# Altium PCB DataLogger_XIAO.PcbDoc
Units mm, origin at the board's own origin, x right, y up, seen from the top; angles counter-clockwise.
Board outline 60 x 60 mm, 2 copper layers (Top Layer, Bottom Layer); 12 components, 12 nets, 42 pads, 2 vias.
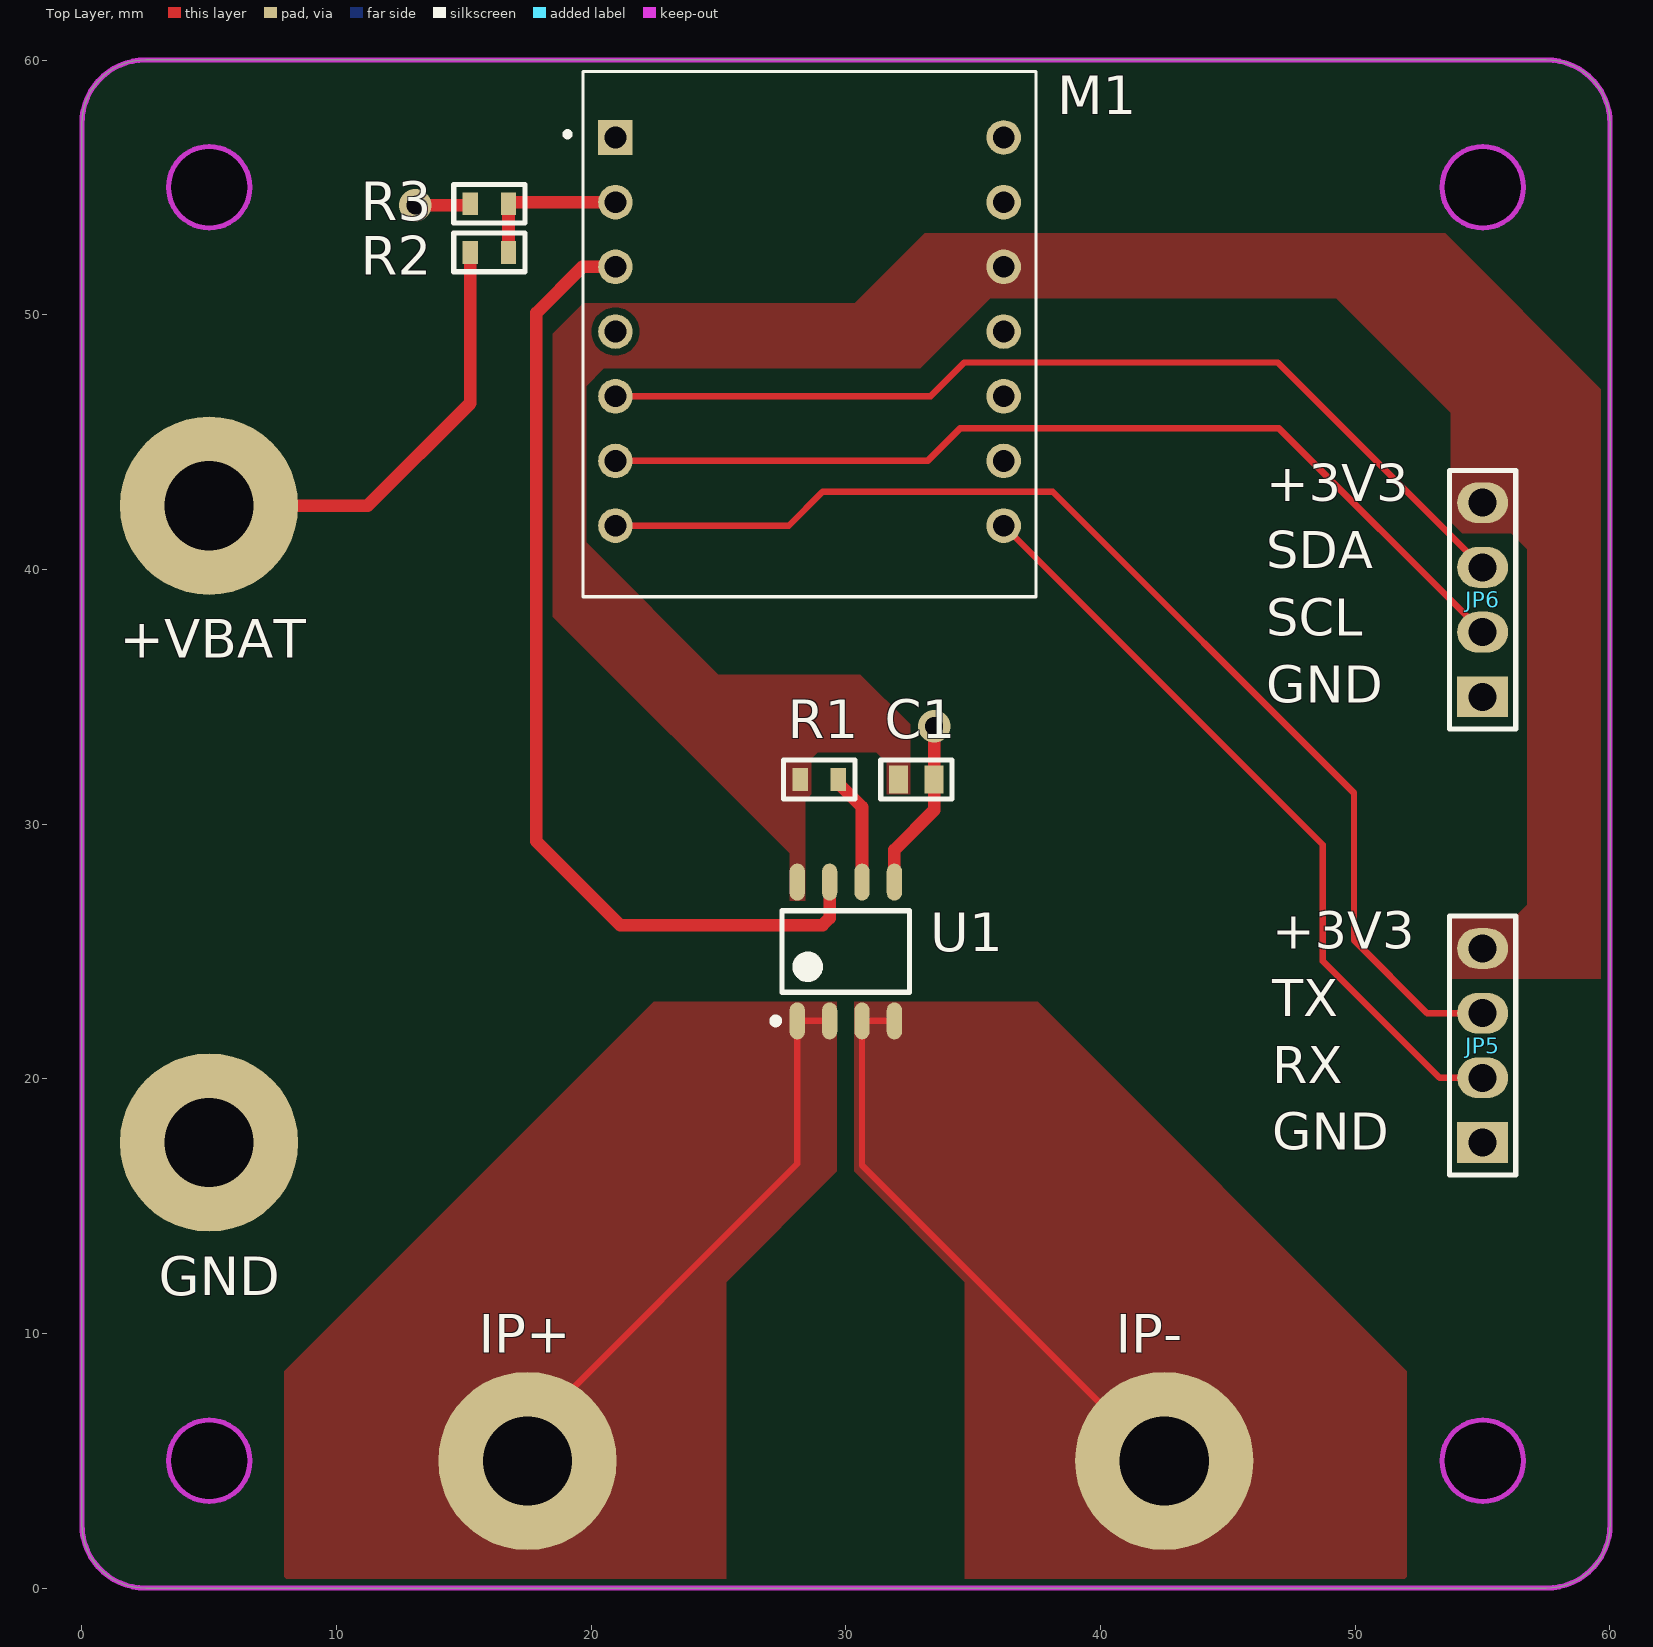
[diagram p0: Top Layer view]
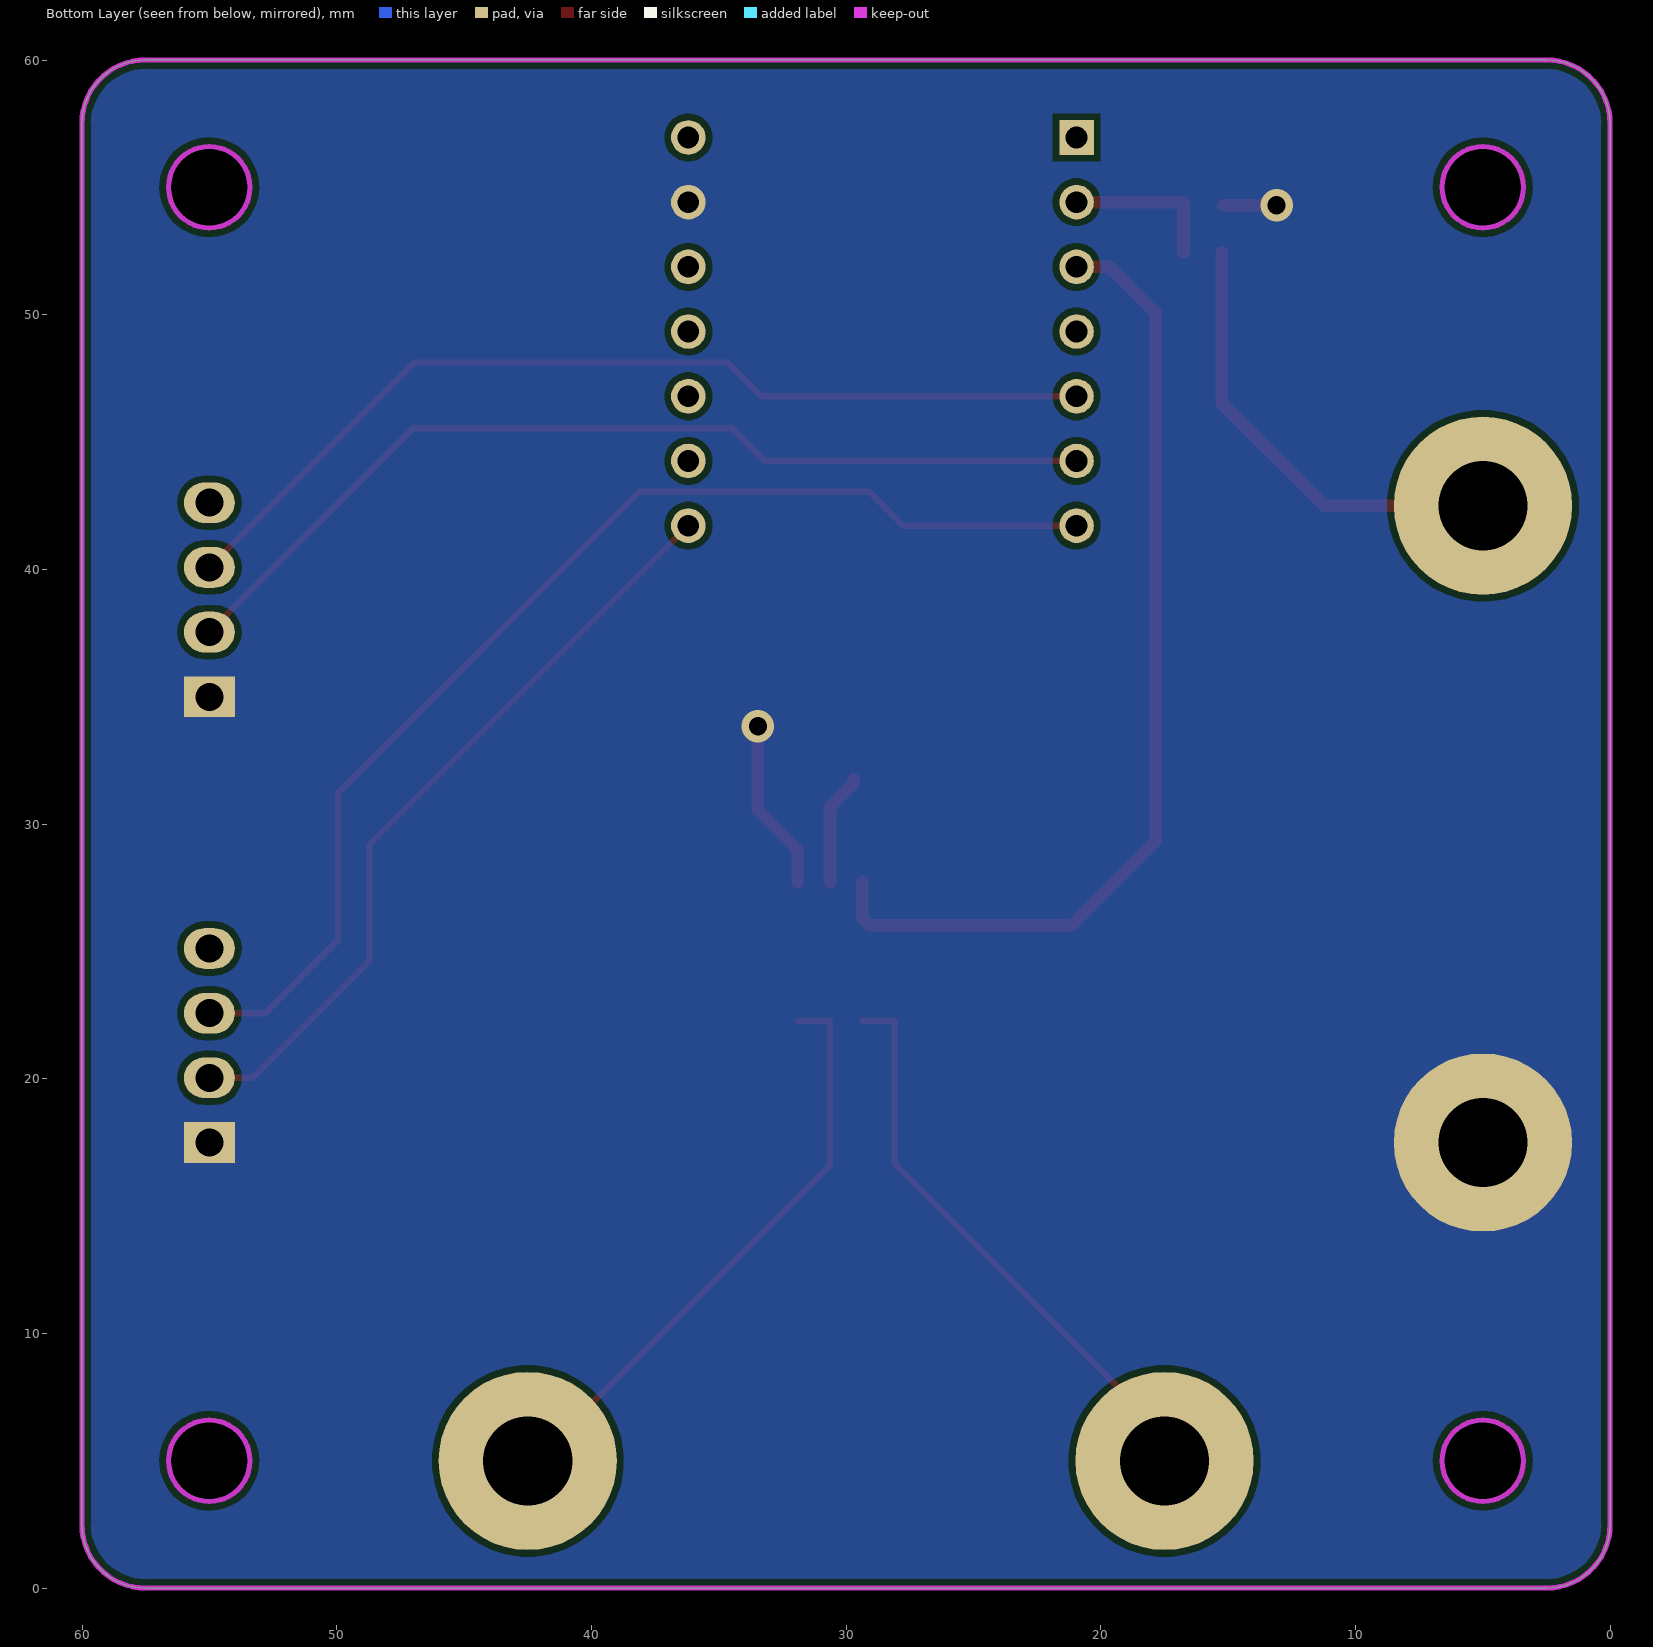
[diagram p1: Bottom Layer view, seen from below]
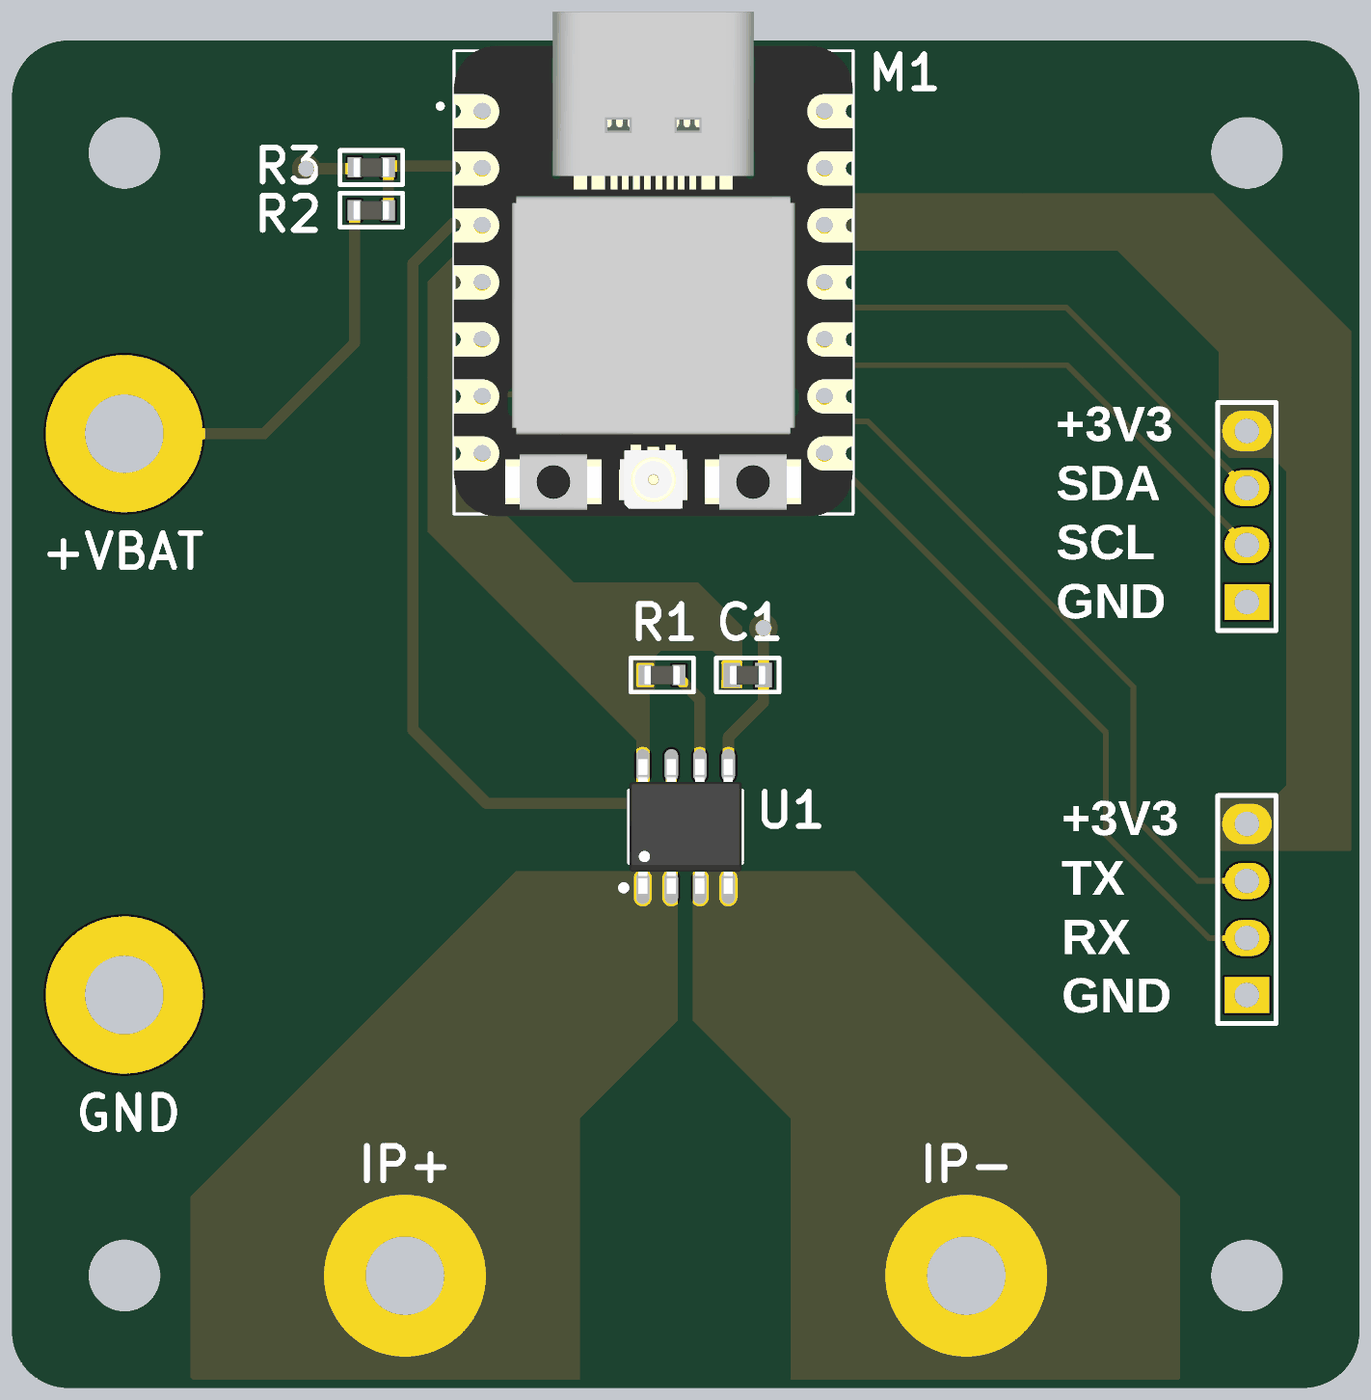
[diagram p2: 3D render of the assembled board from above, using the file's embedded part models]

## Layer stack, top to bottom
Top Solder: solder mask 0.0102, Solder Resist, Dk 3.5
Top Layer: signal copper 0.0356
Dielectric 1: dielectric 0.32, FR-4, Dk 4.8
Bottom Layer: signal copper 0.0356
Bottom Solder: solder mask 0.0102, Solder Resist, Dk 3.5

## Board outline
2.506,0.006 cw(c2.506,2.506) 0.006,2.506 0.006,57.506 cw(c2.506,57.506) 2.506,60.006 57.506,60.006 cw(c57.506,57.506) 60.006,57.506 60.006,2.506 cw(c57.506,2.506) 57.506,0.006
cut-out: 53.406,5.006 ccw(c55.006,5.006) 55.006,3.406 ccw(c55.006,5.006) 56.606,5.006 ccw(c55.006,5.006) 55.006,6.606 ccw(c55.006,5.006)
cut-out: 55.006,53.406 cw(c55.006,55.006) 53.406,55.006 cw(c55.006,55.006) 55.006,56.606 cw(c55.006,55.006) 56.606,55.006 cw(c55.006,55.006)
cut-out: 5.006,53.406 cw(c5.006,55.006) 3.406,55.006 cw(c5.006,55.006) 5.006,56.606 cw(c5.006,55.006) 6.606,55.006 cw(c5.006,55.006)
cut-out: 5.006,3.406 cw(c5.006,5.006) 3.406,5.006 cw(c5.006,5.006) 5.006,6.606 cw(c5.006,5.006) 6.606,5.006 cw(c5.006,5.006)

## Design rules (kind name [scope] priority, off if disabled: settings)
Clearance [All] p1: gap=0.254 ignorepadtopadclearanceinfootprint=FALSE except(0: Arc-Hole Track-Hole SMDPad-Hole THPad-Hole Via-Hole Fill-Hole Poly-Hole Region-Hole Text-Hole)
PlaneConnect [All] p1: planeconnectstyle=Direct reliefexpansion=0.508 reliefentries=4 reliefconductorwidth=0.254 reliefairgap=0.254
PolygonConnect [All] p1: connectstyle=Direct reliefconductorwidth=0.254 reliefentries=4 polygonreliefangle="90 Angle" airgapwidth=0.254
RoutingVias [All] p1: holewidth=0.711 width=1.27 viastyle="Through Hole" minholewidth=0.711 minwidth=1.27 maxholewidth=0.711 maxwidth=1.27
SolderMaskExpansion [All] p1: expansion=0.102 istentingtop=FALSE
Width [All] p1: maxlimit=1 minlimit=0.254 preferedwidth=0.254 minimp=50.000000 maximp=50.000000 favimp=50.000000
29 further rules are at their usual default settings.

## Components (designator, comment, footprint, x,y, rotation, side; value= is the part's Value field where it differs from the comment)
+VBAT "HDR 1X3MM5" "TERMINAL 1X3.55"#1 55,30 r0 top (schematic designator JP3)
C1 "100nF" c0603 32.766,31.75 r0 top
GND "HDR 1X3MM5" "TERMINAL 1X3.55"#2 56.388,17.653 r0 top (schematic designator JP4)
IP+ "HDR 1X3MM5" "TERMINAL 1X3.55"#3 23.622,5.461 r0 top (schematic designator JP1)
IP- "HDR 1X3MM5" "TERMINAL 1X3.55"#4 40.64,5.588 r0 top (schematic designator JP2)
JP5 "HDR 1x4" Hdr_1x4_2.54MM 55,17.5 r180 top
JP6 "HDR 1x4" Hdr_1x4_2.54MM 55,35 r180 top
M1 "XIAO_ESP32C3" MODULE_XIAO_ESP32C3 28.575,49.403 r0 top
R1 "10k" R0603 28.956,31.75 r180 top
R2 "10k" R0603 16.002,52.451 r180 top
R3 "10k" R0603 16.002,54.356 r0 top
U1 "ACS711" SOIC-8N-ACS711 30,25 r90 top

## Footprints (in the part's own frame and the unit in brackets; to place one, negate y for a bottom-side part, rotate by r counter-clockwise, add the part's x,y. Pads: shape width x height; smd on the part's side, far side on the other; paste and mask are expansions set on the pad)
c0603 [mm] "C0603"
  rect 0.75x1.1 smd: 1(-0.7,0) 2(0.7,0)
  silkscreen extent -1.4,-0.76 1.4,0.76, body extent -0.8,-0.42 0.8,0.42, height 0.8
Hdr_1x4_2.54MM [mm] "Creator MM"
  rect 2x1.6 hole 1.1: 1(0,0)
  oval 2x1.6 hole 1.1: 2(0,-2.54) 3(0,-5.08) 4(0,-7.62)
  silkscreen extent -1.3,-8.89 1.3,1.27
MODULE_XIAO_ESP32C3 [mm]
  rect 1.358x1.358 / inner round 1.358 / far side rect 1.358x1.358 hole 0.85 mask+0.05: 1(-7.62,7.556)
  round 1.358 hole 0.85 mask+0.05: 2(-7.62,5.016) 3(-7.62,2.476) 4(-7.62,-0.064) 5(-7.62,-2.603) 6(-7.62,-5.143) 7(-7.62,-7.683) 8(7.62,-7.683) 9(7.62,-5.143) 10(7.62,-2.603) 11(7.62,-0.064) 12(7.62,2.476) 13(7.62,5.016) 14(7.62,7.556)
  silkscreen extent -9.6,-10.48 8.89,10.15, body extent -8.91,-10.58 8.87,11.88, height 4.21
R0603 [mm]
  rect 0.6x0.9 smd: 1(-0.75,0) 2(0.75,0)
  silkscreen extent -1.4,-0.76 1.4,0.76, body extent -0.8,-0.42 0.8,0.42, height 0.8
SOIC-8N-ACS711 [mm] "SOIC, 8-Leads, Body 4.90x3.90mm, Pitch 1.27mm, IPC Medium Density"
  oval 1.45x0.6 smd: 1(-2.725,1.905) 2(-2.725,0.635) 3(-2.725,-0.635) 4(-2.725,-1.905) 5(2.725,-1.905) 6(2.725,-0.635) 7(2.725,0.635) 8(2.725,1.905)
  silkscreen extent -2.85,-2.5 1.6,2.88, body extent -3,-2.5 3,2.5, height 1.75
"TERMINAL 1X3.55"#1 [mm] "TERMINAL 1X3.55"
  round 7 hole 3.5: 1(-50,12.5)
"TERMINAL 1X3.55"#2 [mm] "TERMINAL 1X3.55"
  round 7 hole 3.5: 1(-51.388,-0.153)
"TERMINAL 1X3.55"#3 [mm] "TERMINAL 1X3.55"
  round 7 hole 3.5: 1(-6.122,-0.461)
"TERMINAL 1X3.55"#4 [mm] "TERMINAL 1X3.55"
  round 7 hole 3.5: 1(1.86,-0.588)

## Part data
+VBAT GND IP+ IP-: library part PIN3MM5, "BERGSTIK 3.5 MM", Color=Black, Manufacturer=FCI, Manufacturer Part Number=68000-103HLF, Supplier Part Number 1=609-3461-ND, .Checked PCB=used, .Checked SCH=used, .Creator=MM, Category="Connectors, Interconnects", ComponentLink1Description=http://portal.fciconnect.com/Comergent//fci/drawing/68000.pdf, ComponentLink1URL=http://portal.fciconnect.com/Comergent//fci/drawing/68000.pdf, Connector Type="Header, Unshrouded", Contact Finish="Gold or Gold, GXT™", Contact Finish Thickness="30µin (0.76µm)", Contact Mating Length="0.230\" (5.84mm)", Contact Type="Male Pin", Fastening Type=-, Features=-, Mounting Type="Through Hole", Number of Positions=3, Number of Positions Loaded=All, Number of Rows=1, Packaging=Bulk, Pitch="0.100\" (2.54mm)", Pricing 1="1=0.15, 10=0.145, 25=0.108, 50=0.0924 (USD)", RoHS="RoHS Compliant", Row Spacing=-, Stock 1=37214, Supplier 1=Digi-Key, Termination=Solder
C1: library part 06035C104K4Z4A, "Multilayer Ceramic Capacitor, 0.1 uF, 50 V, ï¿½ 10%, X7R, 0603 [1608 Metric]", Case Code (Imperial)=0603, Case Code (Metric)=1608, Dielectric=X7R, Manufacturer="Kyocera AVX", Max Operating Temperature=125°C, Min Operating Temperature=-55°C, Package Quantity=15000, Ratings=AEC-Q200, Supplier Part Number=96Y8355, Tolerance=10%, Voltage Rating=50V, Case/Package=0603, Category="Ceramic Capacitors", ComponentLink1Description=http://www.mouser.com/ds/2/40/AutoMLCC-777028.pdf?src-supplier=Mouser, ComponentLink1URL=http://www.mouser.com/ds/2/40/AutoMLCC-777028.pdf?src-supplier=Mouser, ComponentLink2Description=https://www.avx.com/docs/Catalogs/flexiterm.pdf?src-supplier=Avnet, ComponentLink2URL=https://www.avx.com/docs/Catalogs/flexiterm.pdf?src-supplier=Avnet, ComponentLink3Description=http://catalogs.avx.com/SurfaceMount.pdf?src-supplier=Digikey, ComponentLink3URL=http://catalogs.avx.com/SurfaceMount.pdf?src-supplier=Digikey, ComponentLink4Description=http://www.farnell.com/datasheets/2880953.pdf?src-supplier=Newark, ComponentLink4URL=http://www.farnell.com/datasheets/2880953.pdf?src-supplier=Newark, ComponentLink5Description=http://www.avx.com/docs/Catalogs/flexiterm.pdf?src-supplier=Future+Electronics, ComponentLink5URL=http://www.avx.com/docs/Catalogs/flexiterm.pdf?src-supplier=Future+Electronics, ComponentLink6Description=https://datasheet.octopart.com/06035C104K4Z4A-AVX-datasheet-50865111.pdf?src-supplier=Future+Electronics, ComponentLink6URL=https://datasheet.octopart.com/06035C104K4Z4A-AVX-datasheet-50865111.pdf?src-supplier=Future+Electronics, ComponentLink7Description=https://datasheet.octopart.com/06035C104K4Z4A-KYOCERA-AVX-datasheet-156093842.pdf?src-supplier=TME, ComponentLink7URL=https://datasheet.octopart.com/06035C104K4Z4A-KYOCERA-AVX-datasheet-156093842.pdf?src-supplier=TME, Features="Soft Termination", Height=0.94mm, Lead Free="Lead Free", Length=1.6mm, Manufacturer Part Number=06035C104K4Z4A, Packaging="Tape and Reel", Pricing="1=0.458, 25=0.314, 100=0.207, 250=0.184, 500=0.16 (USD)", RoHS=Yes, RoHS Compliant=Yes, Series=FLEXITERM®, Stock=4484, Supplier=Avnet, Termination=SMD/SMT, Voltage Rating (DC)=50V, Width=0.81mm
JP5 JP6: library part 68000-104HLF, "Conn Unshrouded Header HDR 4 POS 2.54mm Solder ST Top Entry Thru-Hole BergStik® Bulk", Manufacturer="Amphenol ICC", Supplier Part Number=8632771, Manufacturer Part Number=68000-104HLF, RoHS=Yes, Supplier=Rs
M1: library part 113991054, "Seeed Studio Xiao ESP32C3 Wifi+b", Manufacturer="Seeed Studio", Supplier Part Number=1597-113991054-ND, Category=Uncategorized, Manufacturer Part Number=113991054, Pricing="1=4.99 (USD)", RoHS=No, Stock=3303, Supplier=Digikey
R1 R2 R3: library part TP0603T10K0P0510Z, "RES SMD 10K OHM 1% 1/8W 0603", Manufacturer=Yageo, Manufacturer Part Number=RC0805FR-0710KL, Operating Temperature="-55°C ~ 155°C", Package / Case="0805 (2012 Metric)", Power (Watts)="0.125W, 1/8W", Supplier Device Package=0805, Supplier Part Number 1=311-10.0KCRCT-ND, Temperature Coefficient=±100ppm/°C, Tolerance=±1%, .Checked PCB=RF, .Checked SCH=RF, .Creator=MM, Category=Resistors, ComponentLink1Description=http://www.yageo.com/documents/recent/PYu-RC_Group_51_RoHS_L_1.pdf, ComponentLink1URL=http://www.yageo.com/documents/recent/PYu-RC_Group_51_RoHS_L_1.pdf, Composition="Thick Film", Features="Moisture Resistant", Height="0.024\" (0.60mm)", Number of Terminations=2, Packaging="Cut Tape (CT)", Pricing 1="1=0.1, 10=0.021, 25=0.0148, 100=0.0084, 250=0.0064, 500=0.0051, 1000=0.00376, 2500=0.00326 (USD)", Resistance (Ohms)=10k, RoHS="RoHS Compliant", Size / Dimension="0.079\" L x 0.049\" W (2.00mm x 1.25mm)", Stock 1=4094384, Supplier 1=Digi-Key
U1: library part ACS711ELCTR-25AB-T, "SENSOR CURRENT HALL 25A AC/DC", Case/Package=SOIC, Current Sensing=25A, Frequency=100kHz, Manufacturer="Allegro MicroSystems", Max Operating Temperature=85°C, Max Supply Current=5.5mA, Min Operating Temperature=-40°C, Operating Supply Voltage=3.3V, Package Quantity=1, Supplier Part Number=620-1371-1-ND, -3db Bandwidth=100kHz, Accuracy=5%, Category="Current Sensors", ComponentLink1Description=https://datasheet.ciiva.com/3277/acs711-datasheet-3277044.pdf?src-supplier=Avnet, ComponentLink1URL=https://datasheet.ciiva.com/3277/acs711-datasheet-3277044.pdf?src-supplier=Avnet, Linearity=1%, Manufacturer Part Number=ACS711ELCTR-25AB-T, Number of Channels=1, Packaging="Tape and Reel", Pins=8, Pricing="1=2, 5=1.75, 10=1.499, 25=1.4328, 50=1.2156, 100=1.1323 (USD)", Response Time=4.6us, RoHS=Yes, RoHS Compliant=Yes, Sensitivity=55mV/A, Series=-, Stock=6677, Supplier=Digikey

## Via types
v1: diameter 1.27, hole 0.711, Top Layer to Bottom Layer, tented both sides, 2 vias

## Nets (pads, with @x,y where several pads share a name; then routed paths per layer and width w, separated by ;. In a path a pad name is that pad's centre, name@x,y a point inside that pad or via, vN(x,y) a via of type N, cw(c..) or ccw(c..) an arc to the next point about the centre after c; other vN are vias at no path point)
+3V3: C1.1 JP5.4 JP6.4 M1.12 R1.2 U1.8
ADC_CORRIENTE: M1.3 U1.7 | length 39
  Top Layer w0.5: M1.3 19.654,51.88 17.85,50.075 17.85,29.325 21.14,26.035 29.083,26.035 29.365,26.317 U1.7
ADC_VOLTAJE: M1.2 R2.1 R3.2 | length 6.1
  Top Layer w0.5: R2.1 R3.2 16.816,54.419 M1.2
GND: C1.2 GND.1 JP5.1 JP6.1 M1.13 R3.1 U1.5 | length 8.9
  Top Layer w0.254: R3.1@15.196,54.3 R3.1
  Top Layer w0.5: v1(13.1,54.3) R3.1@15.196,54.3 ; U1.5 31.905,28.984 33.466,30.545 C1.2 v1(33.466,33.846)
NetJP1_1: IP+.1 U1.1 U1.2 | length 22.9
  Top Layer w0.254: IP+.1 17.5,6.07 28.095,16.665 U1.1 U1.2
NetJP2_1: IP-.1 U1.3 U1.4 | length 23.6
  Top Layer w0.254: U1.4 U1.3 30.635,16.609 42.244,5 IP-.1
NetJP3_1: +VBAT.1 R2.2 | length 17.8
  Top Layer w0.5: +VBAT.1 11.225,42.5 15.252,46.527 R2.2
NetR1_1: R1.1 U1.6 | length 4.4
  Top Layer w0.5: R1.1 29.706,31.6 30.635,30.671 U1.6
RX0: JP5.2 M1.8 | length 30.5
  Top Layer w0.254: M1.8 48.725,29.189 48.725,24.625 53.31,20.04 JP5.2
SCL0: JP6.2 M1.6 | length 37.9
  Top Layer w0.254: M1.6 33.21,44.259 34.5,45.55 46.99,45.55 JP6.2
SDA0: JP6.3 M1.5 | length 37.9
  Top Layer w0.254: M1.5 33.325,46.799 34.65,48.125 46.955,48.125 JP6.3
TX0: JP5.3 M1.7 | length 46.5
  Top Layer w0.254: M1.7 27.756,41.719 29.086,43.05 38.125,43.05 49.95,31.225 49.95,25.45 52.82,22.58 JP5.3
pads on no net: M1.1 M1.4 M1.9 M1.10 M1.11 M1.14

## Polygon pours and split planes (outlines as drawn)
GND on Bottom Layer "GND_L02_P000" (solid, remove dead copper, pour order 0): 0,0 60.198,0 60.198,59.802 60,60 0,60
+3V3 on Top Layer "+3V3_L01_P003" (solid, remove dead copper, pour order 3): 53.725,23.925 60,23.925 60,46.725 53.525,53.2 33.1,53.2 30.35,50.45 19.7,50.45 18.5,49.25 18.5,38.15 27.8,28.85 27.8,27 28.4,27 28.4,30.925 28.65,31.175 28.65,32.575 28.9,32.825 31.2,32.825 31.6,32.425 31.6,31.175 32.525,31.175 32.525,33.925 30.575,35.875 25,35.875 19.8,41.075 19.8,47.2 20.5,47.9 32.925,47.9 35.675,50.65 49.25,50.65 53.75,46.15 53.75,41.5 53.675,41.425 56.125,41.425 56.75,40.8 56.75,26.84 56.3,26.39 53.7,26.39
NetJP2_1 on Top Layer "NETJP2_1_L01_P002" (solid, remove dead copper, pour order 2): 30.325,23.025 30.325,16.375 34.675,12.025 34.675,0.35 51.925,0.35 52.025,0.45 52.025,8.525 37.525,23.025
NetJP1_1 on Top Layer "NETJP1_1_L01_P001" (solid, remove dead copper, pour order 1): 29.65,23.025 29.65,16.375 25.3,12.025 25.3,0.35 8.05,0.35 7.95,0.45 7.95,8.525 22.45,23.025

## Keep-outs
Keep-Out Layer:
  lines w0.2: 0.006,2.506 ccw(c2.506,2.506) 2.506,0.006 57.506,0.006 ccw(c57.506,2.506) 60.006,2.506 60.006,57.506 ccw(c57.506,57.506) 57.506,60.006 2.506,60.006 ccw(c2.506,57.506) 0.006,57.506 0.006,2.506 ; 3.406,5.006 cw(c5.006,5.006) 5.006,6.606 cw(c5.006,5.006) 6.606,5.006 cw(c5.006,5.006) 5.006,3.406 cw(c5.006,5.006) 3.406,5.006 ; 3.406,55.006 cw(c5.006,55.006) 5.006,56.606 cw(c5.006,55.006) 6.606,55.006 cw(c5.006,55.006) 5.006,53.406 cw(c5.006,55.006) 3.406,55.006 ; 53.406,5.006 cw(c55.006,5.006) 55.006,6.606 cw(c55.006,5.006) 56.606,5.006 cw(c55.006,5.006) 55.006,3.406 cw(c55.006,5.006) 53.406,5.006 ; 53.406,55.006 cw(c55.006,55.006) 55.006,56.606 cw(c55.006,55.006) 56.606,55.006 cw(c55.006,55.006) 55.006,53.406 cw(c55.006,55.006) 53.406,55.006

## Silkscreen, mask and mechanical layers (free items; w line width, h text height)
Top Overlay:
  text "+3V3" at 46.5,42.18 h2.5
  text "SDA" at 46.5,39.547 h2.5
  text "SCL" at 46.5,36.913 h2.5
  text "GND" at 46.5,34.28 h2.5
  text "+3V3" at 46.75,24.625 h2.5
  text "TX" at 46.75,21.962 h2.5
  text "RX" at 46.75,19.328 h2.5
  text "GND" at 46.75,16.725 h2.5
Mechanical 1:
  circle w0.013: c5.006,55.006 r1.6
  circle w0.013: c5.006,5.006 r1.6
  circle w0.013: c55.006,5.006 r1.6
  circle w0.013: c55.006,55.006 r1.6
  lines w0.013: 0.006,2.506 ccw(c2.506,2.506) 2.506,0.006 57.506,0.006 ccw(c57.506,2.506) 60.006,2.506 60.006,57.506 ccw(c57.506,57.506) 57.506,60.006 2.506,60.006 ccw(c2.506,57.506) 0.006,57.506 0.006,2.506